# Altium PCB Staj_Guncel.PcbDoc
Units mil, origin at the board's own origin, x right, y up, seen from the top; angles counter-clockwise.
Board outline 2037.03 x 1377.03 mil, 2 copper layers (Top Layer, Bottom Layer); 29 components, 19 nets, 143 pads, 20 vias.
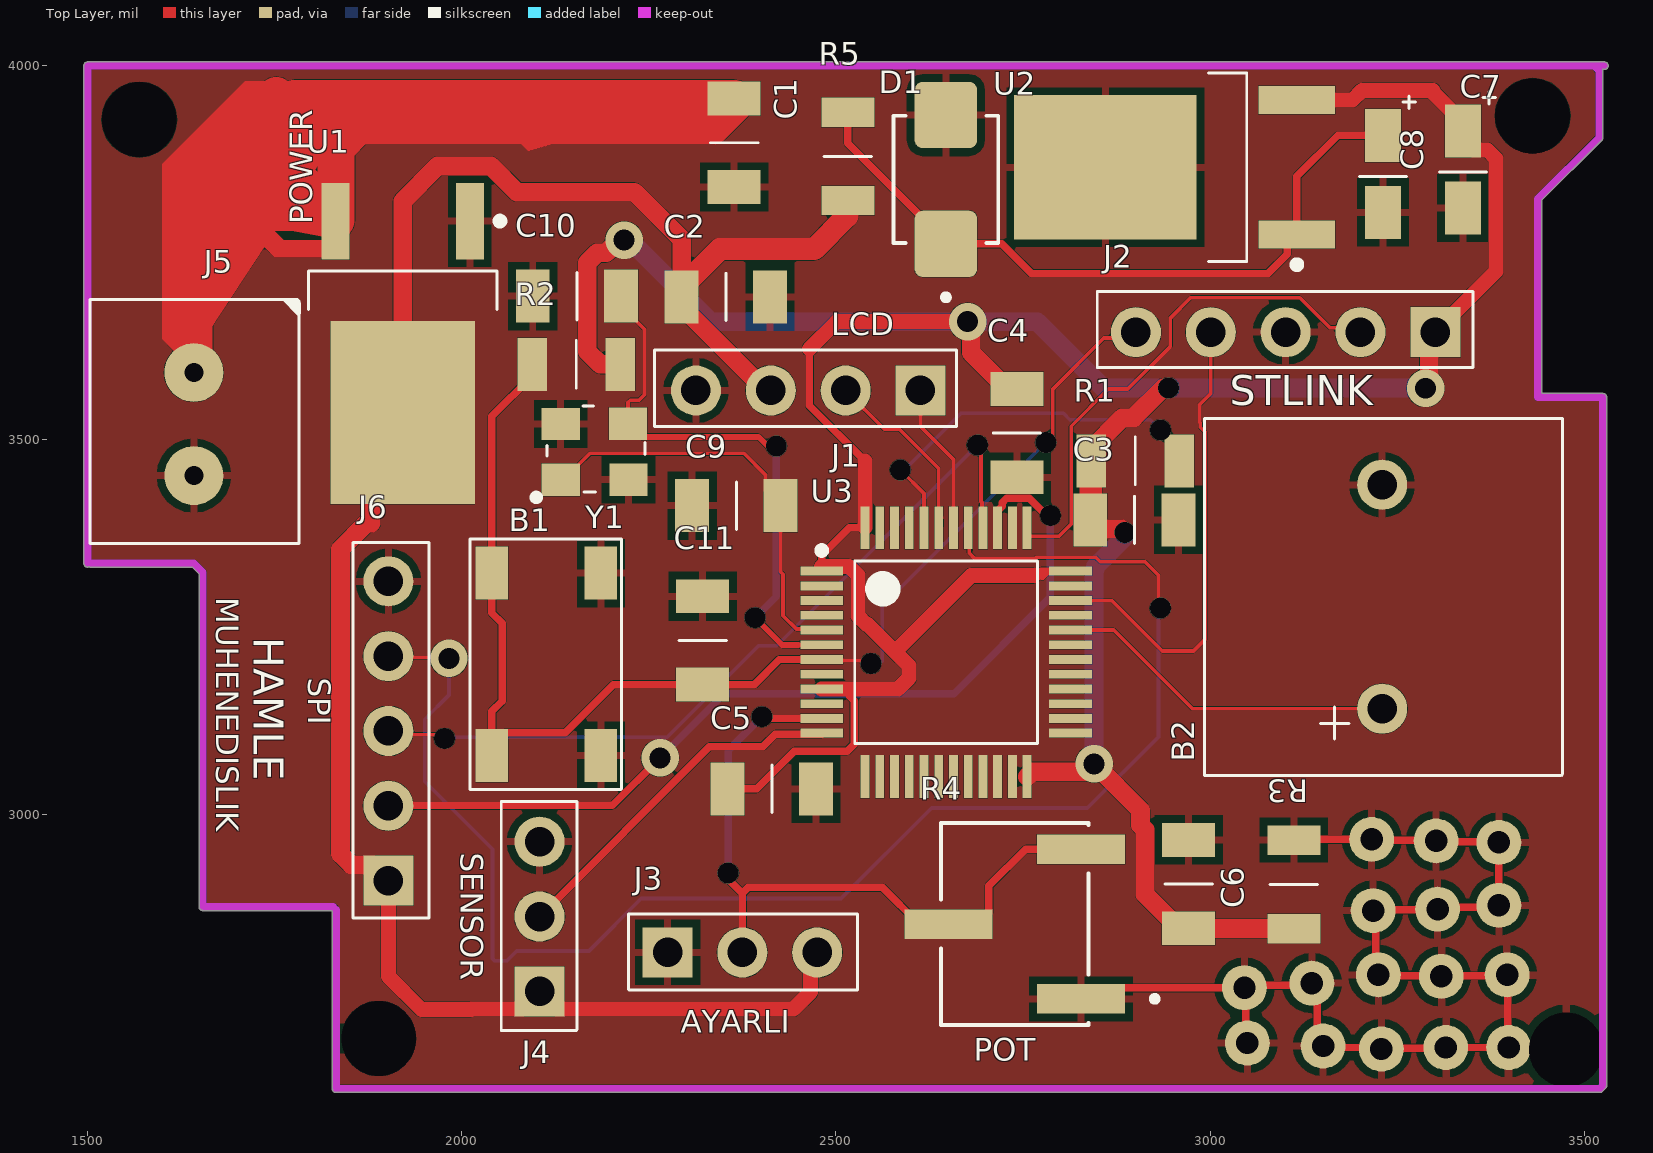
[diagram p0: Top Layer view]
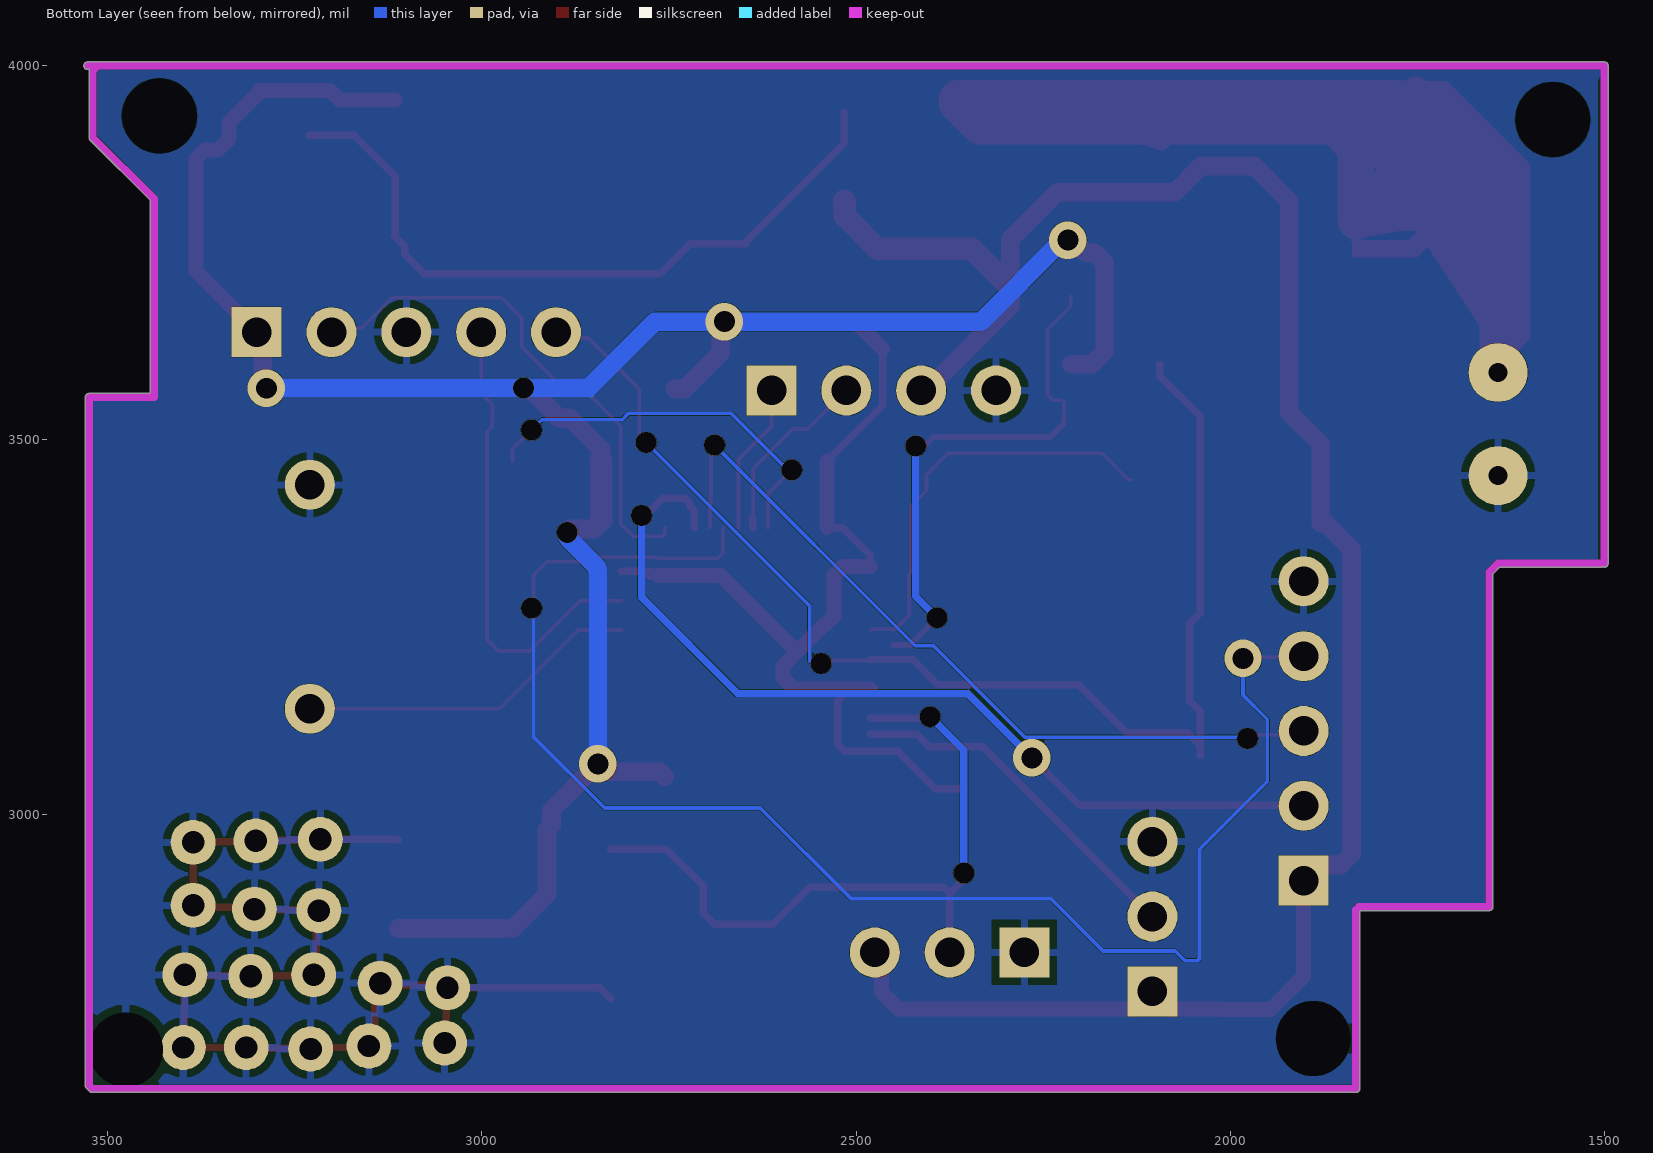
[diagram p1: Bottom Layer view, seen from below]
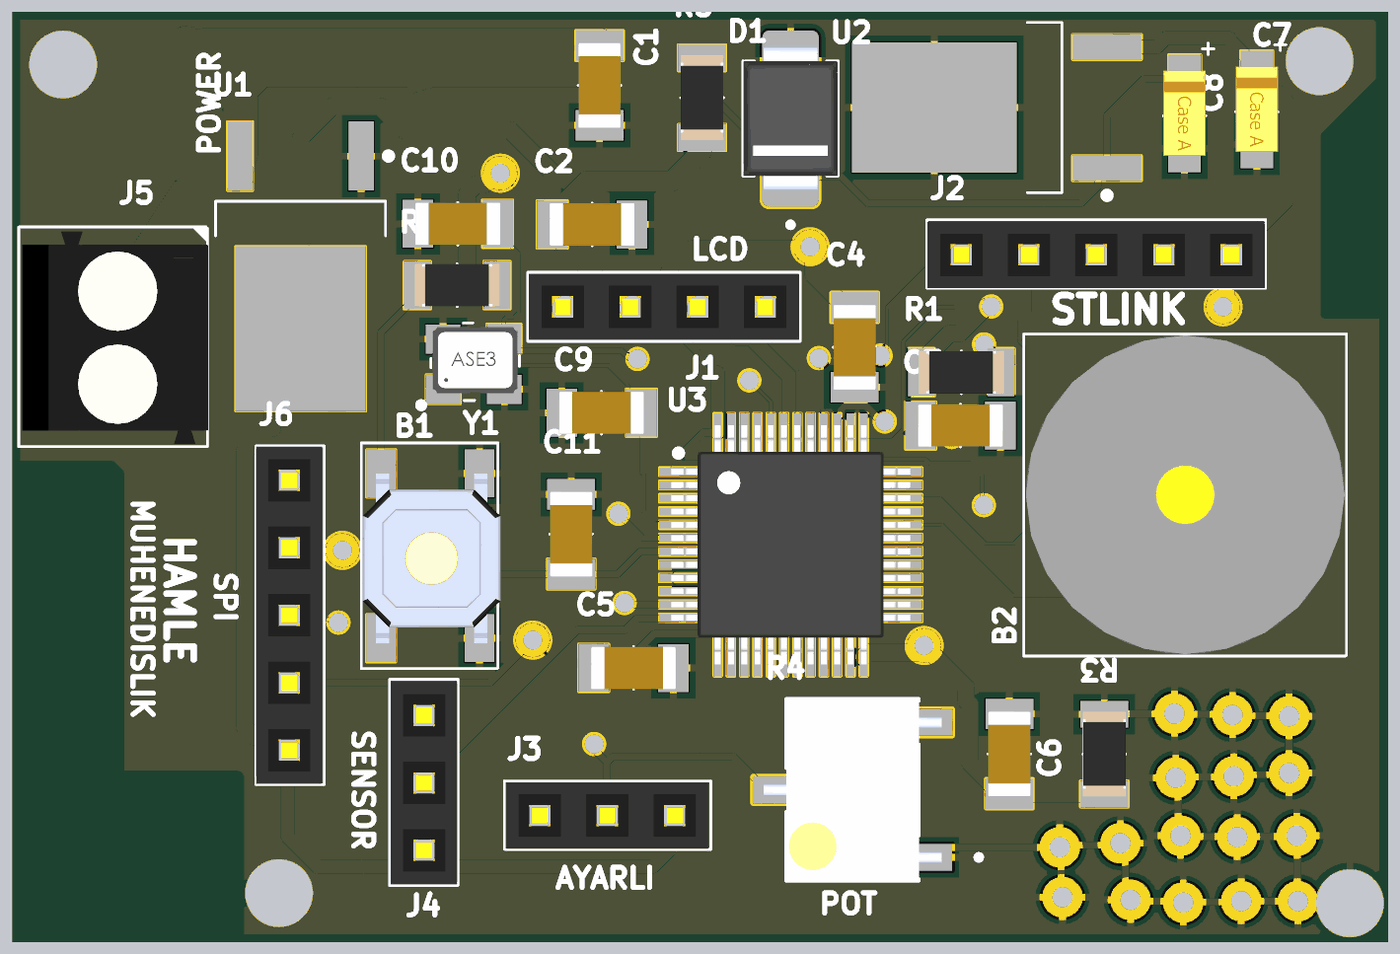
[diagram p2: 3D render of the assembled board from above, using the file's embedded part models]

## Layer stack, top to bottom
Top Solder: solder mask 0.4, Solder Resist, Dk 3.5
Top Layer: signal copper 1.4
Dielectric 1: dielectric 12.6, FR-4, Dk 4.8
Bottom Layer: signal copper 1.4
Bottom Solder: solder mask 0.4, Solder Resist, Dk 3.5

## Board outline
1654,2870.99 1825.92,2870.99 1826.98,2869.92 1826.98,2633 ccw(c1832,2633) 1832,2627.99 3521,2627.99 ccw(c3521,2633) 3524.56,2629.47 3524.55,2629.45 3528.55,2633.45 3528.53,2633.44 ccw(c3525,2637) 3530.01,2637 3530.01,3557 ccw(c3525,3557) 3525,3562.01 3443.01,3562.01 3443.01,3819.92 3523.55,3900.45 3523.53,3900.44 ccw(c3520,3904) 3525.01,3904 3525.01,3993 ccw(c3520,3993) 3524.61,3994.99 3527,3994.99 ccw(c3527,4000) 3532.01,4000 ccw(c3527,4000) 3527,4005.01 1500,4005.01 ccw(c1500,4000) 1494.98,4000 1494.98,3335 ccw(c1500,3335) 1502,3330.4 ccw(c1504,3335) 1504,3329.99 1639.92,3329.99 1648.98,3320.92 1648.98,2876 ccw(c1654,2876)

## Design rules (kind name [scope] priority, off if disabled: settings)
Clearance [All] p1: gap=0.25 ignorepadtopadclearanceinfootprint=FALSE except(0: Arc-Hole Track-Hole SMDPad-Hole THPad-Hole Via-Hole Fill-Hole Poly-Hole Region-Hole Text-Hole)
MinimumSolderMaskSliver [All] p1: minsoldermaskwidth=0.1
PolygonConnect [All] p1: connectstyle=Relief reliefconductorwidth=10 reliefentries=4 polygonreliefangle="90 Angle" airgapwidth=10
RoutingVias [All] p1: holewidth=28 width=50 viastyle="Through Hole" minholewidth=28 minwidth=50 maxholewidth=28 maxwidth=50
SilkToSilkClearance [All] p1: silktosilkclearance=0
SilkToSolderMaskClearance [IsPad] p1: minsilkscreentomaskgap=0 clearancetoexposedcopper=TRUE
SolderMaskExpansion [All] p1: expansion=4 istentingtop=FALSE
Width [All] p1: maxlimit=50 minlimit=5 preferedwidth=10 bottomlayer_maxwidth=30 minimp=50.000000 maximp=50.000000 favimp=50.000000
27 further rules are at their usual default settings.

## Components (designator, comment, footprint, x,y, rotation, side; value= is the part's Value field where it differs from the comment)
B1 "Push Button" "PUSB BUTTON-SMD" 2040.33,3077.91 r90 top
B2 "Buzzer 5v" "Buzzer 5v" 3230,3140.79 r90 top
C1 "330 nF_1206" C1206 2344.31,3874.42 r90 top
C2 "0.1 uF_1206" C1206 2375.58,3671.31 r180 top
C3 "0.1 uF_1206" C1206 2921.58,3373.31 r180 top
C4 "0.1 uF_1206" C1206 2722.31,3486.42 r90 top
C5 "0.1 uF_1206" C1206 2437,3014 r180 top
C6 "0.1 uF_1206" C1206 2991,2929 r270 top
C7 "10 uF - Tantal" "C1206- TANTAL" 3231,3851.88 r270 top
C8 "10 uF - Tantal" "C1206- TANTAL" 3338,3857.88 r270 top
C9 "10 uF" C1206 2389.58,3392.31 r180 top
C10 "10 uF" C1206 2176.58,3672.31 r180 top
C11 "0.1 uF_1206" C1206 2302.31,3209.31 r90 top
D1 "*" DIOM5436X247N 2647,3847.98 r90 top
J1 "Header 2.54 1x4" "Header 2.54 1x4" 2593.32,3537.46 r180 top
J2 "Header 2.54 1x5" "Header 2.54 1x5" 3301,3644 r180 top
J3 "Header 2.54 1x3" "Header 2.54 1x3" 2275,2815.98 r0 top
J4 "Header 2.54 1x3" "Header 2.54 1x3" 2103.02,2763 r90 top
J5 "Klemens 1x2 3.5mm" "Klemens 1x2 - 3.5mm" 1643.97,3527.01 r270 top
J6 "Header 2.54 1x5" "Header 2.54 1x5" 1902,2911 r90 top
R1 "10K_1206" "R1206 Resıstor" 2903,3472 r180 top
R2 "10K_1206" "R1206 Resıstor" 2156,3601 r180 top
R3 "10K R1206" "R1206 Resıstor" 3112,2909 r270 top
R4 "TS63Y500KT20" TRIM_TS63Y500KT20 2739,2853 r180 top
R5 "1K_1206" "R1206 Resıstor" 2516,3875.99 r90 top
U1 "LD108633 DPAK" DPAK228P972X230-3N 1921,3629 r270 top
U2 "L7805-DPAK" DPAK228P972X230-3N 2952.61,3864.24 r180 top
U3 "STM32F101" LQFP48-STM 2647.27,3216.34 r0 top
Y1 "8 MHz 12.5_pf Osc" "8 MHZ Osc." 2171,3466 r0 top

## Footprints (in the part's own frame and the unit in brackets; to place one, negate y for a bottom-side part, rotate by r counter-clockwise, add the part's x,y. Pads: shape width x height; smd on the part's side, far side on the other; paste and mask are expansions set on the pad)
"8 MHZ Osc." [mm]
  rect 1.3x1.1 smd mask+0.05: 1(-0.981,-0.49) 2(1.319,-0.49) 3(1.303,1.417) 4(-0.986,1.401)
  silkscreen extent -1.91,-1.19 1.88,2.01, body extent -1.38,-0.64 1.82,1.86, height 1.22
"Buzzer 5v" [mm]
  round 1.7 hole 1 mask+0.05: 1(0,0) 2(7.6,0)
  silkscreen extent -2.27,-6.12 9.85,6.02, body extent -2.2,-6.05 9.8,5.95, height 9.5
C1206 [mm]
  rect 1.15x1.8 smd mask+0.05: 1(-0.925,-0.5) 2(2.075,-0.5)
  silkscreen extent 0.58,-1.3 0.58,0.31, body extent -1.02,-1.3 2.18,0.3, height 1
"C1206- TANTAL" [mm]
  rect 1.8x1.23 smd mask+0.05: 1(-1.4,0) 1(-1.4,0) 2(1.22,0)
  silkscreen extent -2.74,-0.8 0,1.1, body extent -1.7,-0.8 1.5,0.8, height 1.62
DIOM5436X247N [mm]
  rrect25% 2.25x2.12 smd: A(2.185,0) C(-2.185,0)
  silkscreen extent -4.1,-1.78 2.16,1.78, body extent -2.72,-1.78 2.72,1.78, height 2.46
DPAK228P972X230-3N [mm] "D-PAK, 3-Pads, Body 6,40x6,56mm (max), IPC Medium Density"
  rect 2.6x0.95 smd mask+0.05: 1(-4.15,2.28) 2(-4.15,-2.28)
  rect 6.2x4.9 smd mask+0.05: 3(2.35,0)
  silkscreen extent -4.27,-3.2 -1.15,3.43, body extent -2.5,-3.2 4.1,3.2, height 2.3
"Header 2.54 1x3" [mm]
  rect 1.7x1.7 hole 1 mask+0.05: 1(0,-0.025)
  round 1.7 hole 1 mask+0.05: 2(2.54,-0.025) 3(5.08,-0.025)
  silkscreen extent -1.33,-1.3 6.45,1.28, body extent -1.26,-1.27 6.36,1.23, height 9.1
"Header 2.54 1x4" [mm]
  rect 1.7x1.7 hole 1 mask+0.05: 1(-0.5,-0.725)
  round 1.7 hole 1 mask+0.05: 2(2.04,-0.725) 3(4.58,-0.725) 4(7.12,-0.725)
  silkscreen extent -1.73,-2.1 8.52,0.5, body extent -1.68,-2.05 8.48,0.45, height 9.1
"Header 2.54 1x5" [mm]
  rect 1.7x1.7 hole 1 mask+0.05: 1(0,0)
  round 1.7 hole 1 mask+0.05: 2(2.54,0) 3(5.08,0) 4(7.62,0) 5(10.16,0)
  silkscreen extent -1.28,-1.37 11.48,1.2, body extent -1.25,-1.3 11.45,1.2, height 9.1
"Klemens 1x2 - 3.5mm" [mm]
  round 2 hole 0.65: 1(-1.6,-0.05) 2(1.9,-0.05)
  silkscreen extent -4.11,-3.58 4.2,3.58, body extent -3.9,-3.45 4.09,3.55, height 8.9
LQFP48-STM [mm] "TSQFP, 48-Leads, Body 7,00x7,00mm, Pitch 0,50mm, IPC Medium Density"
  rect 1.45x0.3 smd mask+0.05: 1(-4.225,2.75) 2(-4.225,2.25) 3(-4.225,1.75) 4(-4.225,1.25) 5(-4.225,0.75) 6(-4.225,0.25) 7(-4.225,-0.25) 8(-4.225,-0.75) 9(-4.225,-1.25) 10(-4.225,-1.75) 11(-4.225,-2.25) 12(-4.225,-2.75) 25(4.225,-2.75) 26(4.225,-2.25) 27(4.225,-1.75) 28(4.225,-1.25) 29(4.225,-0.75) 30(4.225,-0.25) 31(4.225,0.25) 32(4.225,0.75) 33(4.225,1.25) 34(4.225,1.75) 35(4.225,2.25) 36(4.225,2.75)
  rect 0.3x1.45 smd mask+0.05: 13(-2.75,-4.225) 14(-2.25,-4.225) 15(-1.75,-4.225) 16(-1.25,-4.225) 17(-0.75,-4.225) 18(-0.25,-4.225) 19(0.25,-4.225) 20(0.75,-4.225) 21(1.25,-4.225) 22(1.75,-4.225) 23(2.25,-4.225) 24(2.75,-4.225) 37(2.75,4.225) 38(2.25,4.225) 39(1.75,4.225) 40(1.25,4.225) 41(0.75,4.225) 42(0.25,4.225) 43(-0.25,4.225) 44(-0.75,4.225) 45(-1.25,4.225) 46(-1.75,4.225) 47(-2.25,4.225) 48(-2.75,4.225)
  silkscreen extent -4.35,-3.1 3.1,3.57, body extent -4.5,-4.5 4.5,4.5, height 1.6
"PUSB BUTTON-SMD" [mm]
  rect 1.8x1.1 smd mask+0.05: 1(0,0) 2(6.2,0) 3(0,-3.7) 4(6.2,-3.7)
  silkscreen extent -1.15,-4.4 7.35,0.75, body extent -0.2,-4.5 6.2,0.7, height 1.5
"R1206 Resıstor" [mm]
  rect 1x1.8 smd mask+0.05: 1(-1.425,0) 2(1.575,0)
  silkscreen extent 0.08,-0.8 0.08,0.81, body extent -1.52,-0.8 1.68,0.81, height 0.55
TRIM_TS63Y500KT20 [mm]
  rect 3x1 smd: 1(-2.25,2.54) 2(2.25,0) 3(-2.25,-2.54)
  silkscreen extent -4.85,-3.42 2.5,3.42, body extent -3.35,-3.42 3.35,3.42, height 8

## Part data
B1: "Smd Push Button", Satın Alma Linki=https://urun.n11.com/diger/mini-pushbutton-switch-smd-P227461537?gclid=Cj0KCQjwkoDmBRCcARIsAG3xzl8Y_-jeD7HocNM6lvuZ_rVp83568XPGtNzlPwXWLph8oCRqo0yh87UaApZYEALw_wcB&gclsrc=aw.ds
C1: library part "330 nF C1206", "330 nF C1206"
C2 C3 C4 C5 C6 C11: library part "0.1 uF C1206", "0.1 uF C1206"
D1: library part S1Z1SMB5919BT3G, "Zener Diode 5.6V 3W Â±5% Surface Mount SMB", Package=None, Availability=Unavailable, MF="{'manufacturer': u'ON Semiconductor'}", MP=S1Z1SMB5919BT3G, Price=None
R1 R2: library part "10K R1206", "10K R1206"
R4: Package=None, Availability=Unavailable, MF="{'manufacturer': u'Vishay Dale'}", MP=TS63Y500KT20, Price=None
R5: library part "1K R1206", "1K R1206"
U1: "LD1086 3.3V REGULATOR"
U2: "L7805 5V REGULATOR. SMD PAKET"
U3: "STM32F101 48 PİNLİ MİKROİŞLEMCİ"
Y1: library part "8 MHz 12.5 pf Osc", "8 MHz 12.5 pf Osc"

## Free pads (board coordinates)
  round 0 hole 100: 5(1569,3928) 5(1889,2700) 5(3431,3933) 5(3476,2685)
  round 60 hole 30: 6(3216,2966) 7(3302,2964) 8(3386,2962) 9(3218,2871) 10(3304,2873) 11(3386,2878) 12(3225,2785) 13(3309,2783) 14(3397,2785) 15(3136,2774) 16(3046,2768) 17(3050,2694) 18(3151,2690) 19(3229,2686) 20(3315,2688) 21(3399,2688)

## Via types
v1: diameter 28, hole 28, Top Layer to Bottom Layer, 14 vias
v2: diameter 50, hole 28, Top Layer to Bottom Layer, 6 vias

## Nets (pads, with @x,y where several pads share a name; then routed paths per layer and width w, separated by ;. In a path a pad name is that pad's centre, name@x,y a point inside that pad or via, vN(x,y) a via of type N, cw(c..) or ccw(c..) an arc to the next point about the centre after c; other vN are vias at no path point)
3: J6.2 U3.39 | length 1221.9
  Top Layer w10: J6.2 1902.46,3011.46 2201.46,3011.46 v2(2265,3075) ; U3.39 2716.17,3405.32 2722.14,3411.29 2722.14,3416.14 2728,3422 2758.09,3422 2781.09,3399 v1(2786.69,3399)
  Bottom Layer w10: v2(2265,3075) 2350.83,3160.83 2657.83,3160.83 2786.69,3289.69 v1(2786.69,3399)
3.3V: C3.2 C4.2 C5.2 C6.2 C8.1 J2.1 R1.2 R2.1 R3.2 U2.2 U3.1 U3.9 U3.24 U3.36 U3.48 | length 4788.6
  Top Layer w10: C5.2 2394.13,3033.69 2444.57,3084.12 2515.12,3084.12 2524.47,3093.47 2524.47,3151.53 U3.9@2508.87,3167.13 ; 2464.54,3621.46 2464.54,3545.93 2539,3471.46 ; 2480.93,3330.83 2480.93,3345.93 2517.68,3382.68 U3.48@2537.78,3382.68 ; 2764.45,3318.5 2768.23,3318.5 2774.34,3324.61 U3.36
  Top Layer w20: 2464.54,3621.46 2501.07,3658 v2(2676,3658) ; U3.9 2508.87,3167.13 2583.13,3167.13 2597.72,3181.72 2597.72,3198.28 2579,3217 ; 2480.93,3330.83 2517.76,3330.83 2529.47,3319.11 2529.47,3264.72 2541.19,3253 2543,3253 2579,3217 ; U3.48 2539,3471.46 ; 2764.45,3318.5 2680.5,3318.5 2579,3217 ; U2.2 3190.07,3954 3203.07,3967 3298,3967 3298,3964.22 3338,3924.22 3338,3913 3338,3901.78 3352.21,3887.57 3370.43,3887.57 3382.21,3875.79 3382.21,3725.21 J2.1
  Top Layer w25: R2.1 2185,3601 2167.86,3618.14 2167.86,3736.75 2181.04,3749.93 2193.17,3749.93 2210.24,3767 v2(2217,3767) ; v2(2676,3658) 2680.78,3653.22 2680.78,3616.53 2729.2,3568.11 C4.2 ; U3.24 2762.13,3056.59 2834.59,3056.59 v2(2845,3067) 2907,3005 2907,2985 2913.03,2978.97 2913.03,2892.8 2958.52,2847.31 C6.2 2971.47,2847.15 3111.84,2847.15 R3.2 ; C3.2 2839.89,3390.92 2850.03,3380.78 2881.22,3380.78 v1(2886,3376) ; R1.2 2840.99,3487.75 2882.55,3529.31 2897.58,3529.31 2937.72,3569.45 v1(2944.48,3569.45) ; v2(3288,3569) 3292.78,3573.78 3292.78,3635.78 J2.1
  Top Layer w30: C3.2 2840.44,3393.55 2840.44,3471.45 R1.2
  Bottom Layer w25: v2(2217,3767) 2218,3766 2225,3766 2333,3658 v2(2676,3658) 2768.94,3658 2857.49,3569.45 v1(2944.48,3569.45) 2944.7,3569.22 3287.78,3569.22 v2(3288,3569) ; v2(2845,3067) 2845,3325.46 2846.75,3327.21 2846.75,3330.36 2885.43,3369.04 2885.43,3375.43 v1(2886,3376)
4: J6.3 U3.40 | length 1066.9
  Top Layer w5: J6.3 1907,3106 1972,3106 v1(1977,3101) ; v1(2689.03,3492.97) 2694.07,3487.93 2694.07,3417.53 2695.2,3416.4 2695.2,3383.96 U3.40
  Bottom Layer w5: v1(1977,3101) 1978.75,3102.75 2274.57,3102.75 2396.63,3224.81 2420.88,3224.81 v1(2689.03,3492.97)
5: J6.4 U3.41 | length 2068.8
  Top Layer w5: J6.4 1903.5,3209.5 1981.5,3209.5 v2(1983,3208) ; U3.41 2678.07,3381.4 2678.07,3348.96 2685.4,3341.63 2766.62,3341.63 2768,3343.01 2847.33,3343.01 2853.34,3337 2913,3337 2931,3319 2931,3277.52 v1(2933.5,3275.02)
  Bottom Layer w5: J6.4 J6.4@1902.5,3210.5 ; v2(1983,3208) 1983,3159.17 1950.5,3126.67 1950.5,3043.5 2041,2953 2041,2806.93 2043.93,2804 2060.39,2804 2073.43,2817.04 2170,2817.04 2239.96,2887 2507,2887 2628,3008 2836,3008 2931,3103 2931,3272.52 v1(2933.5,3275.02)
5V: C2.2 J1.3 J3.3 J4.1 J6.1 R5.1 U1.3 | length 2755.2
  Top Layer w20: J6.1 1902,2783 1946,2739 2013,2739 2013.54,2739.54 2080.54,2739.54 J4.1 2127.46,2739.54 2443.46,2739.54 2466.02,2762.09 2466.02,2806.02 J3.3
  Top Layer w25: J6.1 1881.04,2931.96 1852.64,2931.96 1838,2946.61 1838,3354 1873,3389 1879,3389 1879,3494.48 U1.3 1921,3819 1968.07,3866.07 2038.78,3866.07 2073.85,3831 2231,3831 2293.89,3768.11 2293.89,3703.8 C2.2 2293.89,3678.2 2406.09,3566 J1.3
  Top Layer w30: C2.2@2293.89,3703.8 2345.31,3755.22 2471.22,3755.22 2515,3799 2515,3818.89 R5.1
9V: C1.2 J5.1 U1.2 | length 1874.7
  Top Layer w20: U1.2@1828.56,3795.06 U1.2
  Top Layer w50: J5.1 1642,3822 1731,3911 ; 1752,3960 1735,3943 1735,3804 1824.94,3804 1828.56,3800.37 U1.2@1828.56,3795.06 ; 1776.11,3956.11 C1.2 2364,3949.29 2334.71,3920 1861.29,3920 1832,3890.71 1832,3793.15 U1.2
GND: B1.3 B1.4 B2.2 C1.1 C2.1 C3.1 C4.1 C5.1 C6.1 C7.2 C8.2 C9.2 C10.2 C11.2 D1.A J1.4 J2.3 J3.1 J4.3 J5.2 J6.5 pad.5@3476,2685 pad.6 pad.7 pad.8 pad.9 pad.10 pad.11 pad.12 pad.13 pad.14 pad.15 pad.16 pad.17 pad.18 pad.19 pad.20 pad.21 R3.1 R4.1 U1.1 U2.3 Y1.2 Y1.4 | length 1624.8
  Top Layer w10: R4.1 2842.27,2767.69 3045.69,2767.69 pad.16 ; pad.17 3048,2696 3048,2766 pad.16 ; R3.1 3112.9,2966 pad.6 3217,2965 3301,2965 pad.7 3303,2963 3385,2963 pad.8 pad.11 3383.5,2875.5 3306.5,2875.5 pad.10 3303,2872 3219,2872 pad.9 3221.5,2867.5 3221.5,2788.5 pad.12 3226,2784 3308,2784 pad.13 3310,2784 3396,2784 pad.14 3398,2784 3398,2689 pad.21 pad.20 3314,2687 3230,2687 pad.19 3227,2688 3153,2688 pad.18 3143.5,2697.5 3143.5,2766.5 pad.15 3133,2771 3049,2771 pad.16
IN: C9.1 U3.5 Y1.1 | length 557.4
  Top Layer w5: Y1.1 2136.31,3446.72 2171.59,3482 2377,3482 2405.86,3453.14 2405.86,3432.14 C9.1 2426,3323.71 2429.41,3320.3 2429.41,3264.95 2447.21,3247.15 2479.65,3247.15 U3.5
NetB2_1: B2.1 U3.32 | length 459.9
  Top Layer w5: U3.32 2871.39,3245.87 2976.47,3140.79 B2.1
NetC7_1: C7.1 D1.C R5.2 U2.1 | length 959.5
  Top Layer w10: R5.2 2516,3896.22 2647,3765.22 D1.C 2721.81,3761.95 2761.76,3722 3077,3722 3103,3748 3103,3758.54 3116.7,3772.24 U2.1@3117.39,3772.24 ; U2.1 3116,3852 3171,3907 C7.1@3231,3907
NetJ1_1: J1.1 U3.42 | length 201.6
  Top Layer w5: J1.1 2613,3518 2657.11,3473.89 U3.42
NetJ1_2: J1.2 U3.43 | length 260.1
  Top Layer w5: J1.2 2564.5,3514.5 2584.53,3514.5 2637.43,3461.61 2637.43,3395.33 U3.43
  Top Layer w10: U3.43 2638.33,3383.58 2638.33,3395.33 U3.43@2638.65,3395.65
NetJ3_2: J3.2 R4.2 R4.3 U3.11 | length 961.2
  Top Layer w10: v1(2356,2921) 2356,2913 2375,2894 ; J3.2 2375,2894 ; v1(2401,3130) 2403.24,3127.76 U3.11 ; R4.3 2753.53,2953 2704.47,2903.94 2704.47,2867.69 2689.79,2853 R4.2 2611.05,2853 2562.05,2902 2383,2902 2375,2894
  Bottom Layer w10: v1(2356,2921) 2356,3085 v1(2401,3130)
NetJ4_2: J4.2 U3.12 | length 477.9
  Top Layer w10: J4.2 2331,3090 2402.01,3090 2418.86,3106.85 U3.12@2480.93,3106.85
NetR1_1: R1.1 U3.44 | length 530.5
  Top Layer w5: v1(2586,3460) 2617.74,3428.26 U3.44 ; v1(2933.81,3513.19) 2933.81,3513.04 2959.1,3487.75 R1.1
  Bottom Layer w5: v1(2586,3460) 2591.61,3460 2667.11,3535.5 2803.98,3535.5 2812.48,3527 2920,3527 v1(2933.81,3513.19)
NRST: B1.1 B1.2 C11.1 J2.5 R2.2 U3.7 | length 1733.1
  Top Layer w5: U3.7 2482.21,3205.22 2542.7,3205.22 v1(2546.79,3201.13) ; v1(2780.5,3496.64) 2785.56,3496.64 2789.93,3501.01 2789.93,3567.93 2858,3636 2893,3636 J2.5
  Top Layer w10: B1.1 B1.1@2040.33,3091.68 ; R2.2 2093.99,3585.25 2040.33,3531.59 B1.2 2040.33,3268.67 2054,3255 2054,3151 2040.33,3137.33 B1.1@2040.33,3091.68 ; U3.7 2424.5,3206.5 2390.89,3172.89 C11.1 2202.68,3172.89 2138.13,3108.34 2056.98,3108.34 B1.1@2040.33,3091.68
  Bottom Layer w5: v1(2546.79,3201.13) 2549.72,3204.05 2562,3204.05 2562,3278.14 v1(2780.5,3496.64)
OUT: C10.1 U3.6 Y1.3 | length 723.7
  Top Layer w5: C10.1 2213,3679.2 2244.29,3647.92 2244.29,3560.39 2236.97,3553.07 2225.24,3553.07 2222.31,3550.14 Y1.3
  Top Layer w8: Y1.3 2239.96,3504.15 2396.52,3504.15 2408.93,3491.73 v1(2420.3,3491.73) ; v1(2391.91,3262.31) 2428.04,3226.18 2449.91,3226.18
  Bottom Layer w10: v1(2391.91,3262.31) 2420.3,3290.71 v1(2420.3,3491.73)
PA13: J2.4 U3.34 | length 633.7
  Top Layer w5: U3.34 2813.84,3285 2869,3285 2936,3218 2978,3218 2993.14,3233.14 2993.14,3510.76 2987,3516.9 2987,3523 2986,3524 2986,3547 3001,3562 J2.4
PA14: J2.2 U3.37 | length 704.8
  Top Layer w5: U3.37 2755.54,3374.65 2758.94,3371.25 2798.19,3371.25 2814.45,3387.5 2814.45,3518.25 2864.08,3567.88 2889.89,3567.88 2946.96,3624.96 2946.96,3662.96 2974,3690 3120,3690 3160.04,3649.97 3195.03,3649.97 J2.2
pads on no net: U3.2 U3.3 U3.4 U3.8 U3.10 U3.13 U3.14 U3.15 U3.16 U3.17 U3.18 U3.19 U3.20 U3.21 U3.22 U3.23 U3.25 U3.26 U3.27 U3.28 U3.29 U3.30 U3.31 U3.33 U3.35 U3.38 U3.45 U3.46 U3.47

## Polygon pours and split planes (outlines as drawn)
GND on Top Layer "GND_L01_P000" (solid, pour order 0): 1500,4000 1500,3335 1628,3335 1654,3309 1654,2876 1828,2876 1832,2872 1832,2633 3521,2633 3525,2637 3525,3557 3457,3557 3438,3576 3438,3822 3527,3911 3527,4000
GND on Bottom Layer "GND_L02_P001" (solid, pour order 1): 1509,3979 1509,3340 1504,3335 1516,3323 1654,3323 1654,2876 1828,2876 1828,2637 1832,2633 1834,2635 3523,2635 3523,3555 3525,3557 3438,3557 3438,3822 3520,3904 3520,3993 3527,4000 1500,4000

## Keep-outs
Keep-Out Layer:
  lines w10: 1500,3335 1500,4000 3527,4000 ; 1504,3335 1642,3335 1654,3323 1654,2876 1828,2876 1832,2872 1832,2633 3521,2633 3525,2637 3525,3557 3438,3557 3438,3822 3520,3904 3520,3993 3516,3997

## Other copper
Top Layer:
  region net 3.3V: 2786,3321 2778,3313 2773.73,3313 2768.23,3318.5 2771.29,3321.55
  region: 1867,3870
  region net 9V: 1744,3785 1762,3767 1831,3767 1831,3834 1804,3861 1767,3861 1767,3857 1702,3792 1750,3744 1837,3744 1837,3764 1840,3767
  region: 1749,3771
  region net 9V: 2224,3956 2249.12,3930.88 2325.98,3930.88
  region net 9V: 2342,3961 2321,3940 2049,3940 2049,3926 2089,3886
  region net 9V: 1633,3601 1599,3635 1599,3868 1710,3979 1744,3979 1744,3972 1769,3947 1769,3954 1780,3965 1769,3976 1769,3977 1755,3977 1776,3956 2199,3956 2194,3951 2193,3952 1974,3952 1956,3934 1871,3934 1862,3943 1893,3974 1766,3974 1760,3968 1873,3968 1874,3967

## Silkscreen, mask and mechanical layers (free items; w line width, h text height)
Top Overlay:
  text "POWER" at 1800,3788 h30 r90
  text "LCD" at 2494,3640 h30
  text "STLINK" at 3026,3546 h40
  text "MUHENEDISLIK" at 1672,3290 h30 r270
  text "HAMLE" at 1722,3236 h40 r270
  text "SPI" at 1795,3182 h30 r270
  text "SENSOR" at 1999,2948 h30 r270
  text "AYARLI" at 2293,2708 h30
  text "POT" at 2684,2670 h30